# Altium PCB pipe_corner_noled_pcb.PcbDoc
Units mm, origin at the board's own origin, x right, y up, seen from the top; angles counter-clockwise.
Board outline 21.3 x 21 mm, 2 copper layers (Top Layer, Bottom Layer); 2 components, 4 nets, 8 pads, 0 vias.
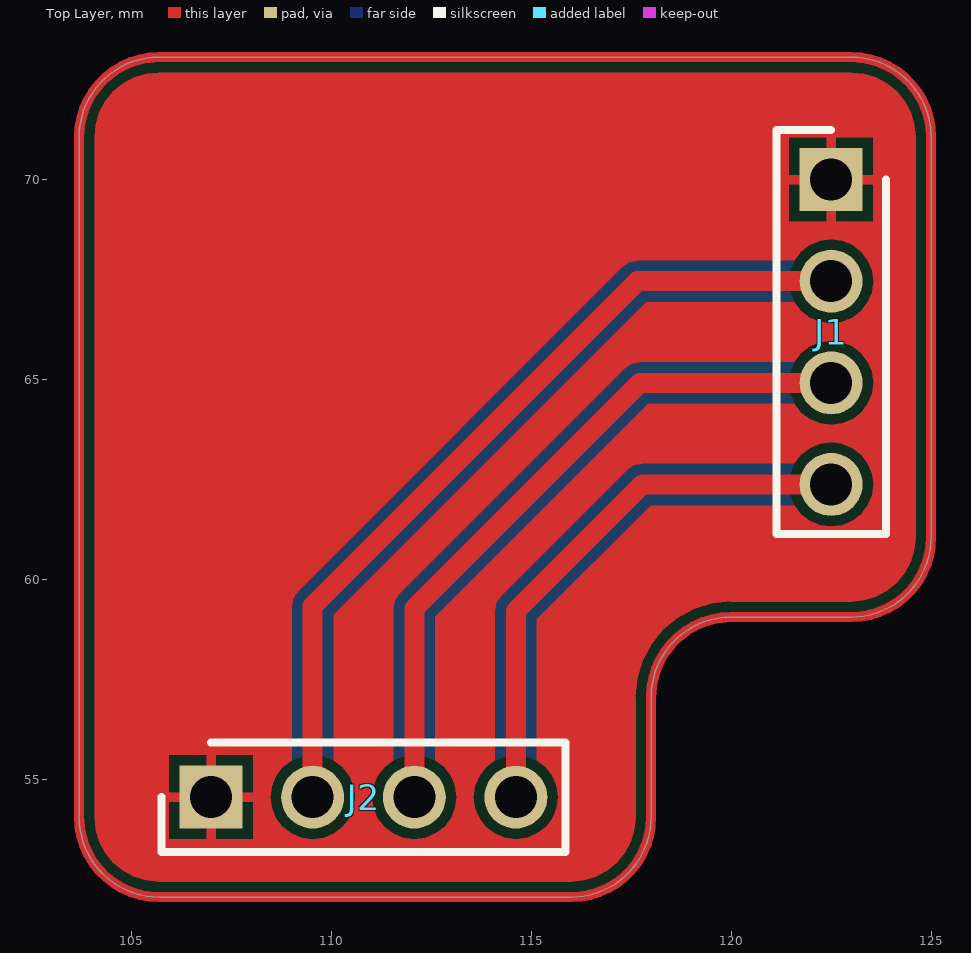
[diagram p0: Top Layer view]
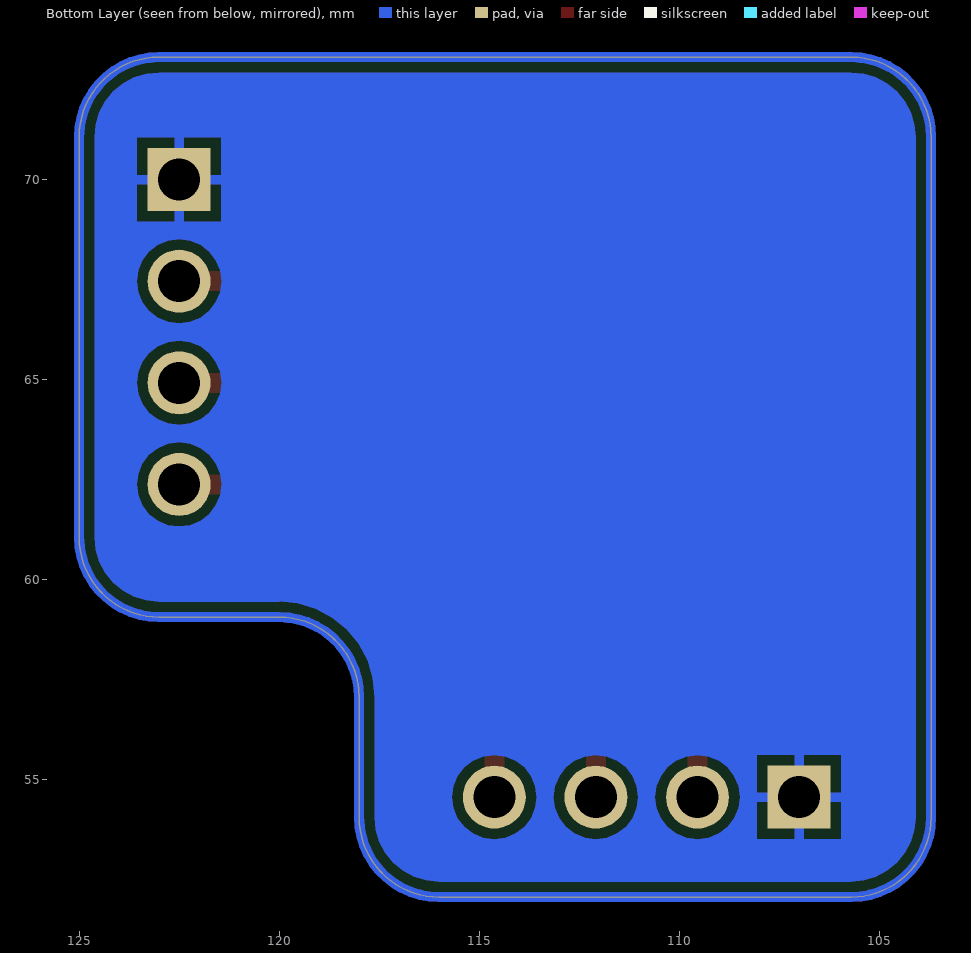
[diagram p1: Bottom Layer view, seen from below]

## Layer stack, top to bottom
Top Solder: solder mask 0.0102, Solder Resist, Dk 3.5
Top Layer: signal copper 0.0356
Dielectric 1: dielectric 0.32, FR-4, Dk 4.8
Bottom Layer: signal copper 0.0356
Bottom Solder: solder mask 0.0102, Solder Resist, Dk 3.5

## Board outline
103.7,54.064 ccw(c105.7,54.064) 105.7,52.064 116,52.064 ccw(c116,54.064) 118,54.064 118,57.064 cw(c120,57.064) 120,59.064 123,59.064 ccw(c123,61.064) 125,61.064 125,71.064 ccw(c123,71.064) 123,73.064 105.7,73.064 ccw(c105.7,71.064) 103.7,71.064

## Design rules (kind name [scope] priority, off if disabled: settings)
Clearance [All] p1: gap=0.254 ignorepadtopadclearanceinfootprint=FALSE except(0: Arc-Hole Track-Hole SMDPad-Hole THPad-Hole Via-Hole Fill-Hole Poly-Hole Region-Hole Text-Hole)
PolygonConnect [All] p1: connectstyle=Relief reliefconductorwidth=0.254 reliefentries=4 polygonreliefangle="90 Angle" airgapwidth=0.254
RoutingVias [All] p1: holewidth=0.711 width=1.27 viastyle="Through Hole" minholewidth=0.711 minwidth=1.27 maxholewidth=0.711 maxwidth=1.27
SolderMaskExpansion [All] p1: expansion=0.102
Width [All] p1: maxlimit=2 minlimit=0.254 preferedwidth=0.5 bottomlayer_maxwidth=0.254 bottomlayer_prefwidth=0.254 minimp=50.000000 maximp=50.000000 favimp=50.000000
30 further rules are at their usual default settings.

## Components (designator, comment, footprint, x,y, rotation, side; value= is the part's Value field where it differs from the comment)
J1 "0022032041" HDRV4W87P0X254_1X4_991X236X1155P 122.5,70 r270 top
J2 "0022032041" HDRV4W87P0X254_1X4_991X236X1155P 107,54.564 r0 top

## Footprints (in the part's own frame and the unit in brackets; to place one, negate y for a bottom-side part, rotate by r counter-clockwise, add the part's x,y. Pads: shape width x height; smd on the part's side, far side on the other; paste and mask are expansions set on the pad)
HDRV4W87P0X254_1X4_991X236X1155P [mm]
  rect 1.575x1.575 hole 1.05: 1(0,0)
  round 1.575 hole 1.05: 2(2.54,0) 3(5.08,0) 4(7.62,0)
  silkscreen extent -1.25,-1.37 8.86,1.37, body extent -1.14,-1.18 8.77,1.18, height 11.55

## Part data
J1 J2: "Connector", Manufacturer_Name=Molex, Mouser Part Number=N/A, Datasheet Link=http://www.molex.com/pdm_docs/sd/022032041_sd.pdf, Height=11.55mm, Manufacturer_Part_Number=0022032041, Mouser Price/Stock=https://www.mouser.com/Search/Refine.aspx?Keyword=N%2FA

## Nets (pads, with @x,y where several pads share a name; then routed paths per layer and width w, separated by ;. In a path a pad name is that pad's centre, name@x,y a point inside that pad or via, vN(x,y) a via of type N, cw(c..) or ccw(c..) an arc to the next point about the centre after c; other vN are vias at no path point)
NetJ1_1: J1.1 J2.1
NetJ1_2: J1.2 J2.2 | length 21.1
  Top Layer w0.5: J2.2 109.54,59.34 117.66,67.46 J1.2
NetJ1_3: J1.3 J2.3 | length 17.5
  Top Layer w0.5: J2.3 112.08,59.28 117.72,64.92 J1.3
NetJ1_4: J1.4 J2.4 | length 13.8
  Top Layer w0.5: J2.4 114.62,59.22 117.78,62.38 J1.4

## Other copper
Top Layer:
  region net NetJ1_1: 67 vertices and 11 holes, not listed, extent 104.087,52.45 124.613,72.677
Bottom Layer:
  region net NetJ1_1: 67 vertices and 14 holes, not listed, extent 104.087,52.45 124.613,72.677
Multi-Layer:
  the board outline again, w0.254